# Altium PCB D5035_03.PcbDoc
Units mil, origin at the board's own origin, x right, y up, seen from the top; angles counter-clockwise.
Board outline 2401.57 x 1299.21 mil, 2 copper layers (Top Layer, Bottom Layer), stack 61.811 mil thick; 40 components, 40 nets, 152 pads, 22 vias.
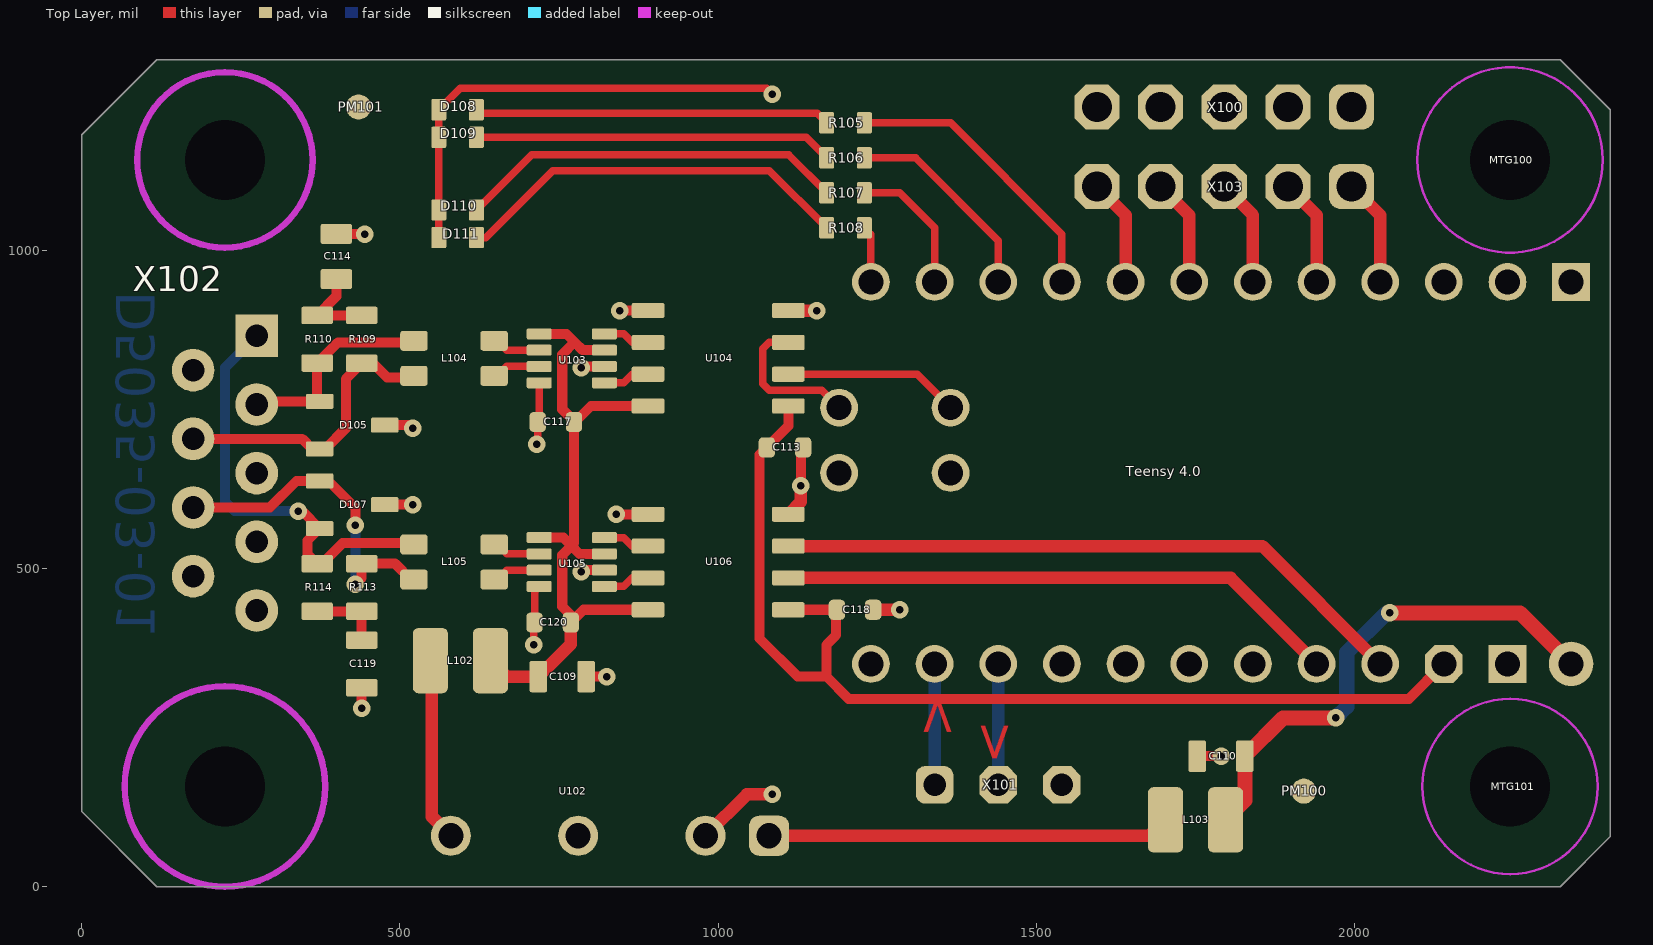
[diagram p0: Top Layer view]
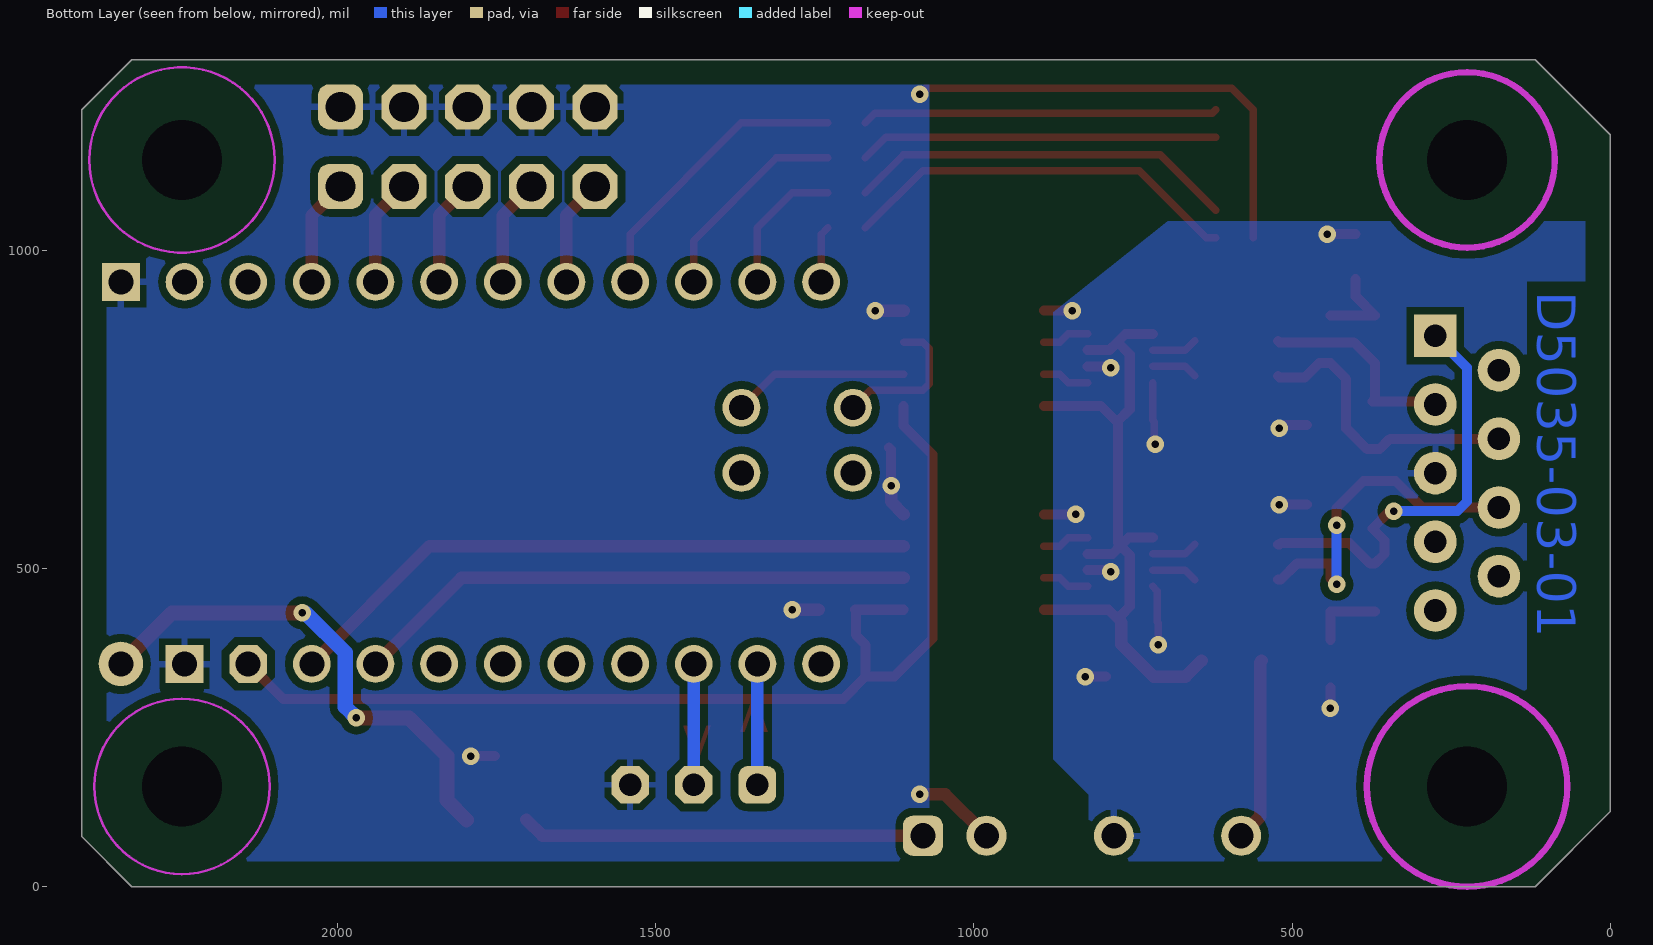
[diagram p1: Bottom Layer view, seen from below]
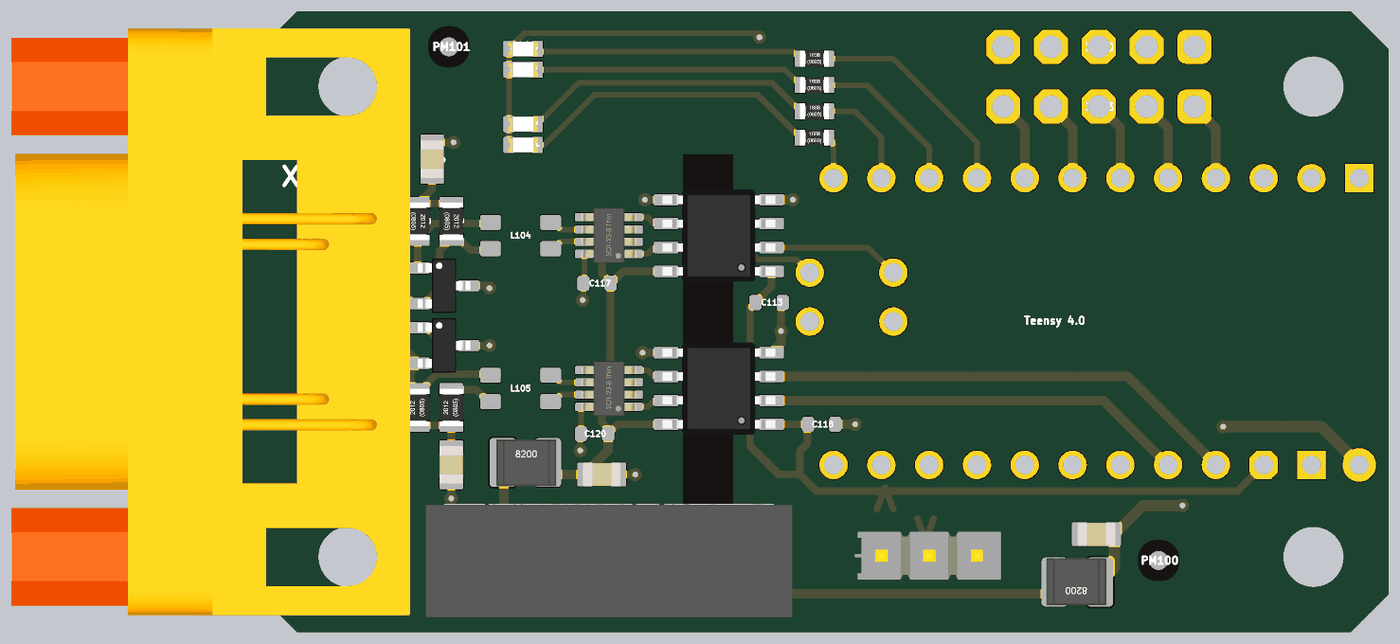
[diagram p2: 3D render of the assembled board from above, using the file's embedded part models]

## Layer stack, top to bottom
Top Solder: solder mask 0.3937, Solder Resist, Dk 3.5
Top Layer: signal copper 1.378
Dielectric 1: dielectric 59.0551, FR-4, Dk 4.8
Bottom Layer: signal copper 1.378
Bottom Solder: solder mask 0.3937, Solder Resist, Dk 3.5

## Board outline
0,118.11 0,1181.1 118.11,1299.21 2322.83,1299.21 2401.57,1220.47 2401.57,78.74 2322.83,0 118.11,0

## Design rules (kind name [scope] priority, off if disabled: settings)
BoardOutlineClearance [All] p1: gap=39.37 ignorepadtopadclearanceinfootprint=FALSE
Clearance [All] p1: gap=6 ignorepadtopadclearanceinfootprint=FALSE except(0: Arc-Hole Track-Hole SMDPad-Hole THPad-Hole Via-Hole Fill-Hole Poly-Hole Region-Hole Text-Hole; 12: Arc-Poly Track-Poly SMDPad-Poly THPad-Poly Via-Poly Fill-Poly Poly-Poly) // 1
DiffPairsRouting [All] p1: maxlimit=10 minlimit=7.87 mostfreqgap=10 toplayer_minwidth=9.84 toplayer_maxwidth=15 toplayer_prefwidth=11.81 bottomlayer_minwidth=9.84 bottomlayer_maxwidth=15 bottomlayer_prefwidth=11.81 maxuncoupledlength=500
HoleSize [All] p1: absolutevalues=TRUE maxlimit=200 minlimit=11.81 maxpercent=80.000 minpercent=20.000
MinimumSolderMaskSliver [All] p1: minsoldermaskwidth=2
PasteMaskExpansion [All] p1 off: expansion=0
PolygonConnect PolygonConnect_2 [IsVia] p1: connectstyle=Direct reliefconductorwidth=10 reliefentries=4 polygonreliefangle="90 Angle" airgapwidth=10
PolygonConnect PolygonConnect_1 [IsPad] p2: thpad.connectstyle=Relief thpad.reliefconductorwidth=10 thpad.reliefentries=4 thpad.polygonreliefangle="90 Angle" thpad.airgapwidth=10 smdpad.connectstyle=Direct smdpad.reliefconductorwidth=10 smdpad.reliefentries=4 smdpad.polygonreliefangle="90 Angle" smdpad.airgapwidth=10 via.connectstyle=Direct via.reliefconductorwidth=10 via.reliefentries=4 via.polygonreliefangle="90 Angle" via.airgapwidth=10
PolygonConnect [All] p3: connectstyle=Relief reliefconductorwidth=16 reliefentries=4 polygonreliefangle="90 Angle" airgapwidth=10
RoutingVias [All] p1: holewidth=11.81 width=23.62 viastyle="Through Hole" minholewidth=11.81 minwidth=23.62 maxholewidth=39.37 maxwidth=78.74
SilkToBoardRegionClearance [All] p1 off:
SilkToSilkClearance [All] p1 off: silktosilkclearance=10
SilkToSolderMaskClearance [IsPad] p1 off: minsilkscreentomaskgap=10 clearancetoexposedcopper=TRUE
SolderMaskExpansion SolderMaskExpansion_VIA [IsVia] p1: expansion=2 istentingtop=FALSE soldermaskfromhole=TRUE
SolderMaskExpansion [All] p2: expansion=2 istentingtop=FALSE
Width [All] p1: maxlimit=100 minlimit=9.84 preferedwidth=11.81 minimp=50.000000 maximp=50.000000 favimp=50.000000
23 further rules are at their usual default settings.

## Components (designator, comment, footprint, x,y, rotation, side; value= is the part's Value field where it differs from the comment)
C109 "4µ7" CAPC2012X14L#1 755,330 r180 top
C110 "4µ7" CAPC2012X14L#1 1790,205 r0 top
C113 "100n" CAPC1608X09L 1105,690 r180 top
C114 "4n7" CAPC2012X14L#2 400,990 r270 top
C117 "100n" CAPC1608X09L 745,730 r0 top
C118 "100n" CAPC1608X09L 1215,435 r180 top
C119 "4n7" CAPC2012X14L#1 440,350 r90 top
C120 "100n" CAPC1608X09L 740,415 r0 top
D105 "PESD1CAN" SOT95P280X110-3N 425,725 r0 top
D107 "PESD1CAN" SOT95P280X110-3N 425,600 r0 top
D108 "green" DIOC1608X06N_LED 590.55,1220.47 r0 top
D109 "red" DIOC1608X06N_LED 590.55,1177.17 r0 top
D110 "green" DIOC1608X06N_LED 590.55,1062.99 r0 top
D111 "red" DIOC1608X06N_LED 590.55,1019.69 r0 top
L102 "82103C" Murata_8200C 595,355 r0 top
L103 "82103C" Murata_8200C 1750,105 r180 top
L104 "DLW32SH101XF2L‎" ACT1210 585,830 r0 top
L105 "DLW32SH101XF2L‎" ACT1210 585,510 r0 top
MTG100 "MH_M3" HOLE_3_2MM 2244.09,1141.73 r0 top
MTG101 "MH_M3" HOLE_3_2MM 2244.09,157.48 r0 top
PM100 "Fidicual" PM100 1920,150 r0 top
PM101 "Fidicual" PM100 435,1225 r0 top
R105 "1k" RESC1608X06L 1200,1200 r0 top
R106 "1k" RESC1608X06L 1200,1145 r0 top
R107 "1k" RESC1608X06L 1200,1090 r0 top
R108 "1k" RESC1608X06L 1200,1035 r0 top
R109 "4k7" RESC2012X06L 440,860 r270 top
R110 "4k7" RESC2012X06L 370,860 r270 top
R113 "4k7" RESC2012X06L 440,470 r90 top
R114 "4k7" RESC2012X06L 370,470 r90 top
"Teensy 4.0" "Teensy_4_0_minimal" TEENSY_4_0_MINIMAL 1690,650 r180 top
U102 "MER1S0505SC" MER1SxxxxC 780,80 r180 top
U103 "TCAN1044V" SOT65P280X100-8N 770,830 r180 top
U104 "SI8621EC-B-IS" SOIC127P600X175-8N 1000,830 r180 top
U105 "TCAN1044V" SOT65P280X100-8N 770,510 r180 top
U106 "SI8621EC-B-IS" SOIC127P600X175-8N 1000,510 r180 top
X100 "1x5 2,54mm" PAD_1x05_2_54mm 1795,1225 r180 top
X101 "1x3 2,54mm" PINH_1x03_2_54mm 1440,160 r0 top
X102 "9651226803" 09651226803 275,649.61 r90 top
X103 "1x5 2,54mm" PAD_1x05_2_54mm 1795,1100 r180 top

## Footprints (in the part's own frame and the unit in brackets; to place one, negate y for a bottom-side part, rotate by r counter-clockwise, add the part's x,y. Pads: shape width x height; smd on the part's side, far side on the other; paste and mask are expansions set on the pad)
09651226803 [mm]
  rect 1.7x1.7 hole 0.9: 1(5.48,0)
  round 1.7 hole 0.9: 2(2.74,0) 3(0,0) 4(-2.74,0) 5(-5.48,0) 6(4.11,2.54) 7(1.37,2.54) 8(-1.37,2.54) 9(-4.11,2.54)
  round 0 hole 3.2 unplated: SH(-12.5,1.27) SH(12.5,1.27)
  body extent -15.6,-2 15.6,19.2, height 13.62
ACT1210 [mm]
  rrect30% 1.1x0.8 smd: 1(-1.6,0.7) 2(-1.6,-0.7) 3(1.6,-0.7) 4(1.6,0.7)
  body extent -1.6,-1.3 1.6,1.3, height 2.5
CAPC1608X09L [mm] "Chip Capacitor, 2-Leads, Body 1,6x0,8mm, IPC High Density"
  rrect50% 0.65x0.8 smd: 1(-0.725,0) 2(0.725,0)
  body extent -0.8,-0.4 0.8,0.4, height 0.9
CAPC2012X14L#1 [mm] "Chip Capacitor, 2-Leads, Body 2,0x1,3mm, IPC High Density"
  rrect20% 0.7x1.25 smd: 1(-0.95,0) 2(0.95,0)
  body extent -1,-0.62 1,0.62, height 0.6
CAPC2012X14L#2 [mm] "Chip Capacitor, 2-Leads, Body 2,0x1,3mm, IPC High Density"
  rrect20% 0.8x1.25 smd: 1(-0.9,0) 2(0.9,0)
  body extent -1,-0.62 1,0.62, height 0.6
DIOC1608X06N_LED [mm]
  rrect20% 0.6x0.85 smd: 1(-0.75,0) 2(0.75,0)
  body extent -0.8,-0.4 0.8,0.4, height 0.7
HOLE_3_2MM [mm] "Mouting-Hole for screws M3 with keepout for washer"
  round 0 hole 3.2 unplated: 1(0,0)
  Keep-Out Layer circle w0.1: c0,0 r3.7
MER1SxxxxC [mm]
  rrect50% 1.6x1.6 hole 1: 1(-7.62,0)
  round 1.6 hole 1: 2(-5.08,0) 4(0,0) 6(5.08,0)
  body extent -9.5,-4.77 10,1.25, height 10.1
Murata_8200C [mm]
  rrect30% 1.4x2.6 smd paste+0 mask+0.102: 1(-1.2,0)
  rrect30% 1.4x2.6 smd: 2(1.2,0)
  body extent -1.55,-1.26 1.65,1.24, height 2
PAD_1x05_2_54mm [mm] "Lötpad 5 polig"
  rrect50% 1.8x1.8 hole 1.2: 1(-5.08,0)
  oct 1.8x1.8 hole 1.2: 2(-2.54,0) 3(0,0) 4(2.54,0) 5(5.08,0)
PINH_1x03_2_54mm [mm] "Pin-Header 3 polig"
  rrect50% 1.5x1.5 hole 0.9: 1(-2.54,0)
  oct 1.5x1.5 hole 0.9: 2(0,0) 3(2.54,0)
  body extent -3.94,-1.27 3.81,1.27, height 8.38
PM100 [mm] "Passermarke für Bestueckungsautomaten rund"
  rect 0.2x0.2 smd mask+1: 1(0,0)
  round 1 smd: 1(0,0)
  Top Layer pour cut-out: -1.2,1.2 1.2,1.2 1.2,-1.2 -1.2,-1.2
RESC1608X06L [mm] "Chip Resistor, 2-Leads, Body 1,6x0,8mm, IPC High Density"
  rrect20% 0.6x0.85 smd: 1(-0.75,0) 2(0.75,0)
  body extent -0.78,-0.43 0.78,0.43, height 0.45
RESC2012X06L [mm] "Chip Resistor, 2-Leads, Body 2,0x1,3mm, IPC High Density"
  rrect20% 0.7x1.25 smd: 1(-0.95,0) 2(0.95,0)
  body extent -1,-0.62 1,0.62, height 0.45
SOIC127P600X175-8N [mm] "SOIC, 8-Leads, Body 5,0x4,0mm (max), Pitch 1,27mm, IPC Medium Density"
  rrect20% 1.3x0.6 smd: 1(-2.8,1.905) 2(-2.8,0.635) 3(-2.8,-0.635) 4(-2.8,-1.905) 5(2.8,-1.905) 6(2.8,-0.635) 7(2.8,0.635) 8(2.8,1.905)
  body extent -3,-2.45 3,2.45, height 1.7
SOT65P280X100-8N [mm] "SOT23, 8-Leads, Body 3,0x3,0mm (max), Pitch 0,65mm, IPC Medium Density"
  rrect30% 1x0.44 smd: 1(-1.3,0.975) 2(-1.3,0.325) 3(-1.3,-0.325) 4(-1.3,-0.975) 5(1.3,-0.975) 6(1.3,-0.325) 7(1.3,0.325) 8(1.3,0.975)
  body extent -1.47,-1.47 1.47,1.47, height 1.1
SOT95P280X110-3N [mm] "SOT23, 3-Leads, Body 3,0x3,0mm (max), Pitch 0,95mm, IPC Medium Density"
  rrect20% 1.1x0.6 smd: 1(-1.3,0.95) 2(-1.3,-0.95) 3(1.3,0)
  body extent -1.4,-1.45 1.4,1.45, height 1.3
TEENSY_4_0_MINIMAL [mm]
  round 1.508 hole 1: 0(-13.97,-7.62) 1(-11.43,-7.62) 2(-8.89,-7.62) 3(-6.35,-7.62) 4(-3.81,-7.62) 5(-1.27,-7.62) 6(1.27,-7.62) 7(3.81,-7.62) 8(6.35,-7.62) 9(8.89,-7.62) 10(11.43,-7.62) 15(11.43,7.62) 16(8.89,7.62) 17(6.35,7.62) 18(3.81,7.62) 19(1.27,7.62) 20(-1.27,7.62) 21(-3.81,7.62) 22(-6.35,7.62) 23(-8.89,7.62) 28(12.7,0) 29(8.255,0) 30(12.7,-2.603) 31(8.255,-2.603)
  oct 1.508x1.508 / inner round 1.393 / far side oct 1.508x1.508 hole 1: 3V3(-11.43,7.62)
  rect 1.508x1.508 / inner round 1.393 / far side rect 1.508x1.508 hole 1: GND1(-16.51,-7.62) GND2(-13.97,7.62)
  round 1.778 hole 1: VIN(-16.51,7.62)
  body extent -17.78,-8.89 17.78,8.89, height 5

## Part data
C109 C110 C114 C119: library part CAPC_0805, "0805 Chip Capacitor", Bauteilart=Capacitor, Editor=rriedel, Kategorie=generic, PackageDescription=0805, Part Number=CAPC_0805, Status=tested, Unterart=unpolarized
C113 C117 C118 C120: library part CAPC_0603, "0603 Chip Capacitor", Bauteilart=Capacitor, Editor=rriedel, Kategorie=generic, PackageDescription=0603, Part Number=CAPC_0603, Status=tested, Unterart=unpolarized
D105 D107: "CAN bus ESD protection diode", Manufacturer=Nexperia, Bauteilart=Diode, Date=27.06.2020, Distributor_1=Digi-Key, Distributor_1_Part_Number=1727-3817-1-ND, Editor=rriedel, Kategorie=Part, PackageDescription=SOT23, Part Number=PESD1CAN, Part_Number_1=PESD1CAN, Status=new, Unterart=Transil
D108 D109 D110 D111: library part LED_0603, "LED, 0603", Bauteilart=Diode, Date=29.06.2020, Editor=rriedel, Kategorie=generic, PackageDescription=0603, Part Number=LED_0603, Status=new, Unterart=generic
L102 L103: "10µH, 0,5A, 400mR", Manufacturer=Murata, Bauteilart=Inductor, Date=27.06.2020, Distributor_1=Digi-Key, Distributor_1_Part_Number=811-2473-1-ND, Editor=rriedel, Kategorie=Part, PackageDescription="3,2x2,5 mm", Part Number=82103C, Part_Number_1=82103C, Status=new, Unterart=Power
L104 L105: library part ACT1210-101-2P-TL00, "Common Mode Filter,  -50°C ... +150°C, AEC-Q200", Manufacturer=TDK, Bauteilart=Inductor, Date=17.10.2017, Distributor_1=Farnell, Distributor_1_Part_Number=2442838, Distributor_2=Digi-Key, Distributor_2_Part_Number=445-172386-1-ND, Editor=rriedel, Kategorie=Part, PackageDescription=3225, Part Number=ACT1210-101-2P-TL00, Part_Number_1=ACT1210-101-2P-TL00, Status=tested, Unterart=Filter
MTG100 MTG101: "Mounting-Hole for M3 screws", Bauteilart=Mechanic, Date=13.05.2018, Editor=rriedel, Kategorie=No_Bom, Part Number=MH_M3, Status=tested, Unterart=Holes
PM100 PM101: library part PM100, "Passermarke für Bestueckungsautomaten 1mm rund, 2,2mm quadratischer Ausschnitt, 2,1 mm Ausstellung Loetstoplack", Bauteilart=Manufacturing, Date=22.02.2017, Editor=rriedel, Kategorie=No_Bom, PackageDescription="Passermarke 1.0mm rund", Part Number=PM100, Status=tested, Unterart=Passermarke
R105 R106 R107 R108: library part RESC_0603, "0603 Chip Resistor", Bauteilart=Resistor, Editor=rriedel, Kategorie=generic, PackageDescription=0603, Part Number=RESC_0603, Status=tested, Unterart=generic
R109 R110 R113 R114: library part RESC_0805, "0805 Chip Resistor", Bauteilart=Resistor, Editor=rriedel, Kategorie=generic, PackageDescription=0805, Part Number=RESC_0805, Status=tested, Unterart=generic
U102: "Isolated 1W Single Output DC-DC Converters 5V/5V 200mA", Manufacturer=Murata, Bauteilart=Module, Date=27.06.2020, Distributor_1=Digi-Key, Distributor_1_Part_Number=811-2124-5-ND‎, Editor=rriedel, Kategorie=Part, PackageDescription="4Pin SIP", Part Number=MER1S0505SC, Part_Number_1=MER1S0505SC, Status=new, Unterart=DCDC
U103 U105: "CAN-FD transceiver 8MBit, VIO Pin", Manufacturer=TI, Bauteilart=IC, Date=28.06.2020, Distributor_1=Digi-Key, Distributor_1_Part_Number=296-TCAN1044VDDFRCT-ND, Editor=rriedel, Kategorie=Part, PackageDescription=SOT23-8, Part Number=TCAN1044V, Part_Number_1=TCAN1044VDDFR, Status=new, Unterart=CAN
U104 U106: "Dual channel digital isolator, 150Mbit, 3,75kV", Manufacturer="Silicon Labs", Bauteilart=IC, Date=29.06.2020, Distributor_1=Digi-Key, Distributor_1_Part_Number=336-4776-1-ND, Editor=rriedel, Kategorie=Part, PackageDescription=SO8, Part Number=SI8621EC-B-IS, Part_Number_1=SI8621EC-B-IS, Status=new, Unterart=Isolator
X100 X103: library part PINH_1x5_2_54, "Pin-Header 2,54 mm 5pins", Bauteilart=Connector, Date=20.06.2017, Editor=rriedel, Kategorie=generic, Part Number=PINH_1x5_2_54, Status=tested, Unterart=Pin-Header
X101: library part PINH_1x3_2_54, "Pin-Header 2,54 mm 3pins", Bauteilart=Connector, Date=02.02.2017, Editor=rriedel, Kategorie=generic, Part Number=PINH_1x3_2_54, Status=tested, Unterart=Pin-Header
X102: "D-Sub, 9 pin, male, right angle", Manufacturer=Harting, Bauteilart=Connector, Date=29.06.2020, Distributor_1=Farnell, Distributor_1_Part_Number=2752007, Editor=rriedel, Kategorie=Part, PackageDescription=D-Sub, Part Number=9651226803, Part_Number_1=9651226803, Status=new, Unterart=D-Sub

## Via types
v1: diameter 27.56, hole 11.81, Top Layer to Bottom Layer, tented both sides, 22 vias

## Nets (pads, with @x,y where several pads share a name; then routed paths per layer and width w, separated by ;. In a path a pad name is that pad's centre, name@x,y a point inside that pad or via, vN(x,y) a via of type N, cw(c..) or ccw(c..) an arc to the next point about the centre after c; other vN are vias at no path point)
3V3: "Teensy 4.0.3V3" C113.2 C118.2 U104.1 U106.1 | length 1708.9
  Top Layer w15.75: U106.1 C118.2 1185,433.54 1185,395 1170,380 1170,330 ; U104.1 1110.24,723.78 C113.2 1065,678.54 1065,390 1125,330 1170,330 ; 2140,350 2085,295 1205,295 1170,330
5V: "Teensy 4.0.VIN" C110.2 L103.1 | length 801.4
  Top Layer w23.62: L103.1 1827.4,135.16 C110.2 1887.4,265 v1(1970,265) ; v1(2055,430) 2260,430 2340,350
  Bottom Layer w23.62: v1(1970,265) 1987.5,282.5 1987.5,367.77 2049.73,430 v1(2055,430)
5V2: C109.2 C117.2 C120.2 L102.2 U103.3 U103.5 U104.8 U105.3 U105.5 U106.8 | length 1142.6
  Top Layer w15.75: U105.5 756.61,548.39 769.41,535.59 ; U103.5 761.61,868.39 774.41,855.59 ; C117.2 773.54,539.72 769.41,535.59 ; U105.3 782.2,522.8 769.41,535.59 ; U103.3 787.2,842.8 774.41,855.59 ; U106.8 788.54,435 C120.2 768.54,426.46 755,440 755,521.18 769.41,535.59 ; U104.8 800,755 775,730 755,750 755,836.18 774.41,855.59
  Top Layer w19.68: L102.2 667.24,330 C109.2 768.54,380.94 C120.2
CAN_RX_1: "Teensy 4.0.30" U104.3 | length 234.9
  Top Layer w12: U104.3 1080,855 1070,845 1070,790 1080,780 1162.5,780 1190,752.5
CAN_RX_2: "Teensy 4.0.23" U106.3 | length 1006.4
  Top Layer w19.68: U106.3 1855,535 2040,350
CAN_TX_1: "Teensy 4.0.31" U104.2 | length 276.5
  Top Layer w11.81: U104.2 1312.5,805 1365,752.5
CAN_TX_2: "Teensy 4.0.22" U106.2 | length 885.7
  Top Layer w19.68: U106.2 1805,485 1940,350
GND: "Teensy 4.0.GND1" "Teensy 4.0.GND2" C110.1 C113.1 C118.1 D108.1 D109.1 D110.1 D111.1 U102.2 U104.4 U106.4 X100.1 X100.2 X100.3 X100.4 X100.5 X101.3 | length 1112.5
  Top Layer w11.81: D111.1 D110.1 D109.1 D108.1 594.49,1253.94 1076.06,1253.94 v1(1085,1245)
  Top Layer w15.75: v1(1130,630) 1130,686.46 C113.1 ; C110.1 v1(1790,205)
  Top Layer w19.68: U102.2 1045,145 v1(1085,145) ; U106.4 1130,604.76 v1(1130,630) ; U104.4 v1(1155,905) ; C118.1 v1(1285,435)
GND2: C109.1 C114.1 C117.1 C119.1 C120.1 D105.3 D107.3 U102.4 U103.2 U103.8 U104.5 U105.2 U105.8 U106.5 X102.3 | length 562.3
  Top Layer w11.81: v1(710,380) 710,413.54 C120.1 711.46,464.25 U105.8 ; v1(715,695) 716.46,696.46 C117.1 718.82,732.36 U103.8
  Top Layer w15.75: C114.1 400.43,1025 v1(445,1025) ; v1(440,280) C119.1 ; D107.3 v1(520,600) ; D105.3 515,725 v1(520,720) ; v1(785,495) 787.2,497.2 U105.2 ; v1(785,815) 787.2,817.2 U103.2 ; C109.1 v1(825,330) ; v1(840,585) U106.5 ; v1(845,905) U104.5
NetC114_2: C114.2 R109.1 R110.1 | length 139.6
  Top Layer w15.75: C114.2 400,927.4 R110.1 R109.1
NetC119_2: C119.2 R113.1 R114.1 | length 115.2
  Top Layer w15.75: R114.1 R113.1 C119.2
NetD108_2: D108.2 R105.1 | length 558.9
  Top Layer w11.81: D108.2 625.55,1215 1155.47,1215 R105.1
NetD109_2: D109.2 R106.1 | length 563.7
  Top Layer w11.81: D109.2 1138.31,1177.17 R106.1
NetD110_2: D110.2 R107.1 | length 611.3
  Top Layer w11.81: D110.2 707.09,1150 1110.47,1150 R107.1
NetD111_2: D111.2 R108.1 | length 631.3
  Top Layer w11.81: D111.2 634.69,1019.69 740,1125 1080.47,1125 R108.1
NetL102_1: L102.1 U102.6 | length 288.4
  Top Layer w19.68: L102.1 550,352.76 550,110 U102.6
NetL103_2: L103.2 U102.1 | length 633.1
  Top Layer w19.68: U102.1 1677.76,80 L103.2
NetL104_3: L104.3 U103.7 | length 71.9
  Top Layer w11.81: L104.3@652.99,802.44 667.76,817.2 U103.7
NetL104_4: L104.4 U103.6 | length 71.9
  Top Layer w11.81: L104.4@652.99,857.56 667.76,842.8 U103.6
NetL105_3: L105.3 U105.7 | length 71.9
  Top Layer w11.81: L105.3@652.99,482.44 667.76,497.2 U105.7
NetL105_4: L105.4 U105.6 | length 71.9
  Top Layer w11.81: L105.4@652.99,537.56 667.76,522.8 U105.6
NetR105_2: "Teensy 4.0.7" R105.2 | length 458
  Top Layer w11.81: R105.2 1365,1200 1540,1025 1540,950
NetR106_2: "Teensy 4.0.8" R106.2 | length 329.3
  Top Layer w11.81: R106.2 1310,1145 1440,1015 1440,950
NetR107_2: "Teensy 4.0.9" R107.2 | length 218.3
  Top Layer w11.81: R107.2 1285,1090 1340,1035 1340,950
NetR108_2: "Teensy 4.0.10" R108.2 | length 89.3
  Top Layer w11.81: R108.2 1240,1024.53 1240,950
"NetTeensy 4.0_2": "Teensy 4.0.2" X103.1 | length 168.6
  Top Layer w19.68: X103.1 2040,1055 2040,950
"NetTeensy 4.0_3": "Teensy 4.0.3" X103.2 | length 168.6
  Top Layer w19.68: X103.2 1940,1055 1940,950
"NetTeensy 4.0_4": "Teensy 4.0.4" X103.3 | length 168.6
  Top Layer w19.68: X103.3 1840,1055 1840,950
"NetTeensy 4.0_5": "Teensy 4.0.5" X103.4 | length 168.6
  Top Layer w19.68: X103.4 1740,1055 1740,950
"NetTeensy 4.0_6": "Teensy 4.0.6" X103.5 | length 168.6
  Top Layer w19.68: X103.5 1640,1055 1640,950
NetU103_1: U103.1 U104.7 | length 74.1
  Top Layer w11.81: U103.1 851.61,791.61 865,805 U104.7
NetU103_4: U103.4 U104.6 | length 74.1
  Top Layer w11.81: U103.4 851.61,868.39 865,855 U104.6
NetU105_1: U105.1 U106.7 | length 74.1
  Top Layer w11.81: U105.1 851.61,471.61 865,485 U106.7
NetU105_4: U105.4 U106.6 | length 74.1
  Top Layer w11.81: U105.4 851.61,548.39 865,535 U106.6
RX: "Teensy 4.0.16" X101.1 | length 190
  Bottom Layer w19.68: X101.1 1340,350
TX: "Teensy 4.0.17" X101.2 | length 190
  Bottom Layer w19.68: X101.2 1440,350
X_CAN_1_H: D105.2 L104.2 R109.2 X102.7 | length 465.4
  Top Layer w15.75: X102.7 346.46,703.54 362.4,687.6 D105.2 382.6,687.6 415,720 415,797.6 R109.2 457.4,822.6 480,800 519.57,800 L104.2
X_CAN_1_L: D105.1 L104.1 R110.2 X102.2 | length 329.1
  Top Layer w15.75: X102.2 279.92,762.4 D105.1 370,766.22 R110.2 402.4,855 519.45,855 L104.1
X_CAN_2_H: D107.1 L105.2 R113.2 X102.8 | length 538.7
  Top Layer w15.75: X102.8 295.67,595.67 337.4,637.4 D107.1 387.6,637.4 430,595 v1(430,567.65) ; v1(430,475) 440,485 R113.2 492.6,507.4 517.56,482.44 L105.2
  Bottom Layer w15.75: v1(430,475) v1(430,567.65)
X_CAN_2_L: D107.2 L105.1 R114.2 X102.1 | length 683.2
  Top Layer w15.75: v1(340,590) 346.42,590 D107.2 355,543.78 355,522.4 R114.2 377.4,507.4 410,540 517.56,540 520,537.56 L105.1
  Bottom Layer w15.75: X102.1 225,815.35 225,605 240,590 v1(340,590)
pads on no net: "Teensy 4.0.0" "Teensy 4.0.1" "Teensy 4.0.15" "Teensy 4.0.18" "Teensy 4.0.19" "Teensy 4.0.20" "Teensy 4.0.21" "Teensy 4.0.28" "Teensy 4.0.29" MTG100.1 MTG101.1 PM100.1 PM101.1 X102.4 X102.5 X102.6 X102.9 X102.SH

## Polygon pours and split planes (outlines as drawn)
GND on Bottom Layer "GND_L02_P006" (solid, remove dead copper, pour order 6): 1070,1299.21 2401.58,1299.21 2401.58,0 1070,0
GND2 on Bottom Layer "GND2_L02_P007" (solid, remove dead copper, pour order 7): 875,902.61 695,1045 0,1045 0,-10 504.19,-10 819.57,-5 819.57,144.57 875,200

## Keep-outs
Keep-Out Layer:
  circle w10: c225,1141.73 r137.8
  circle w10: c225,157.48 r157.48

## Other copper
Top Layer:
  text ">" at 1408.78,261.22 h60 r270
  text ">" at 1371.22,233.78 h60 r90
Bottom Layer:
  text "D5035-03-01" at 115,935 h60 r90

## Silkscreen, mask and mechanical layers (free items; w line width, h text height)
Top Solder:
  rectangle: 925,240 1030,1000
Bottom Solder:
  rectangle: 925,240 1030,1000
M1_Dimension:
  the board outline again, w10

## Dimensions
118.11,1299.21 to 2401.57,1220.47 on M2_Measures
118.11,1299.21 to 118.11,0 on M2_Measures